# Altium PCB pcb.PcbDoc (part 1 of 2)
Units mm, origin at the board's own origin, x right, y up, seen from the top; angles counter-clockwise.
Board outline 150 x 136 mm, 2 copper layers (Top Layer, Bottom Layer); 100 components, 101 nets, 620 pads, 663 vias.
Unrouted connection lines stored in the file: 2.
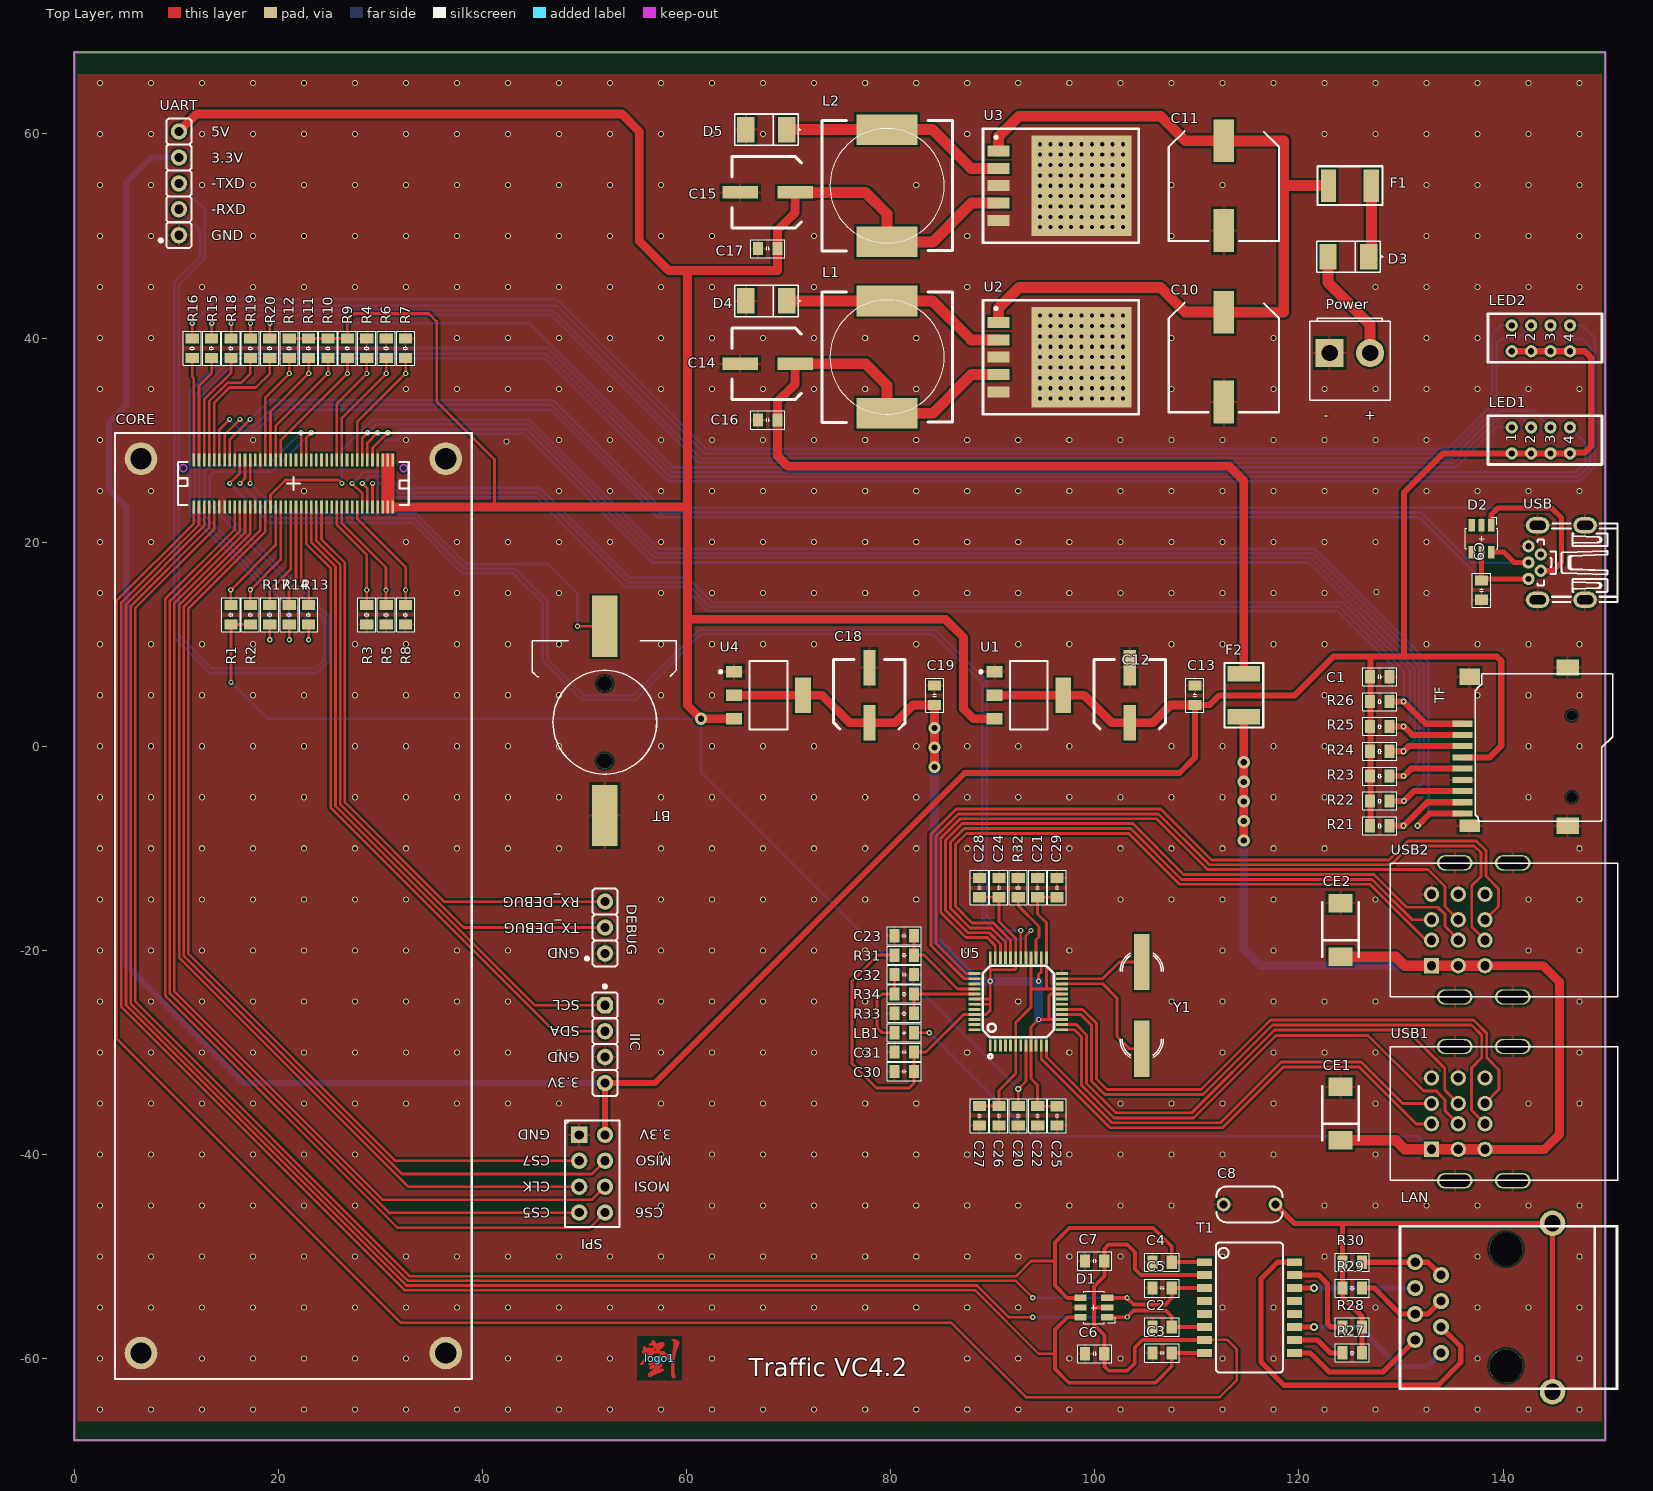
[diagram p0: Top Layer view]
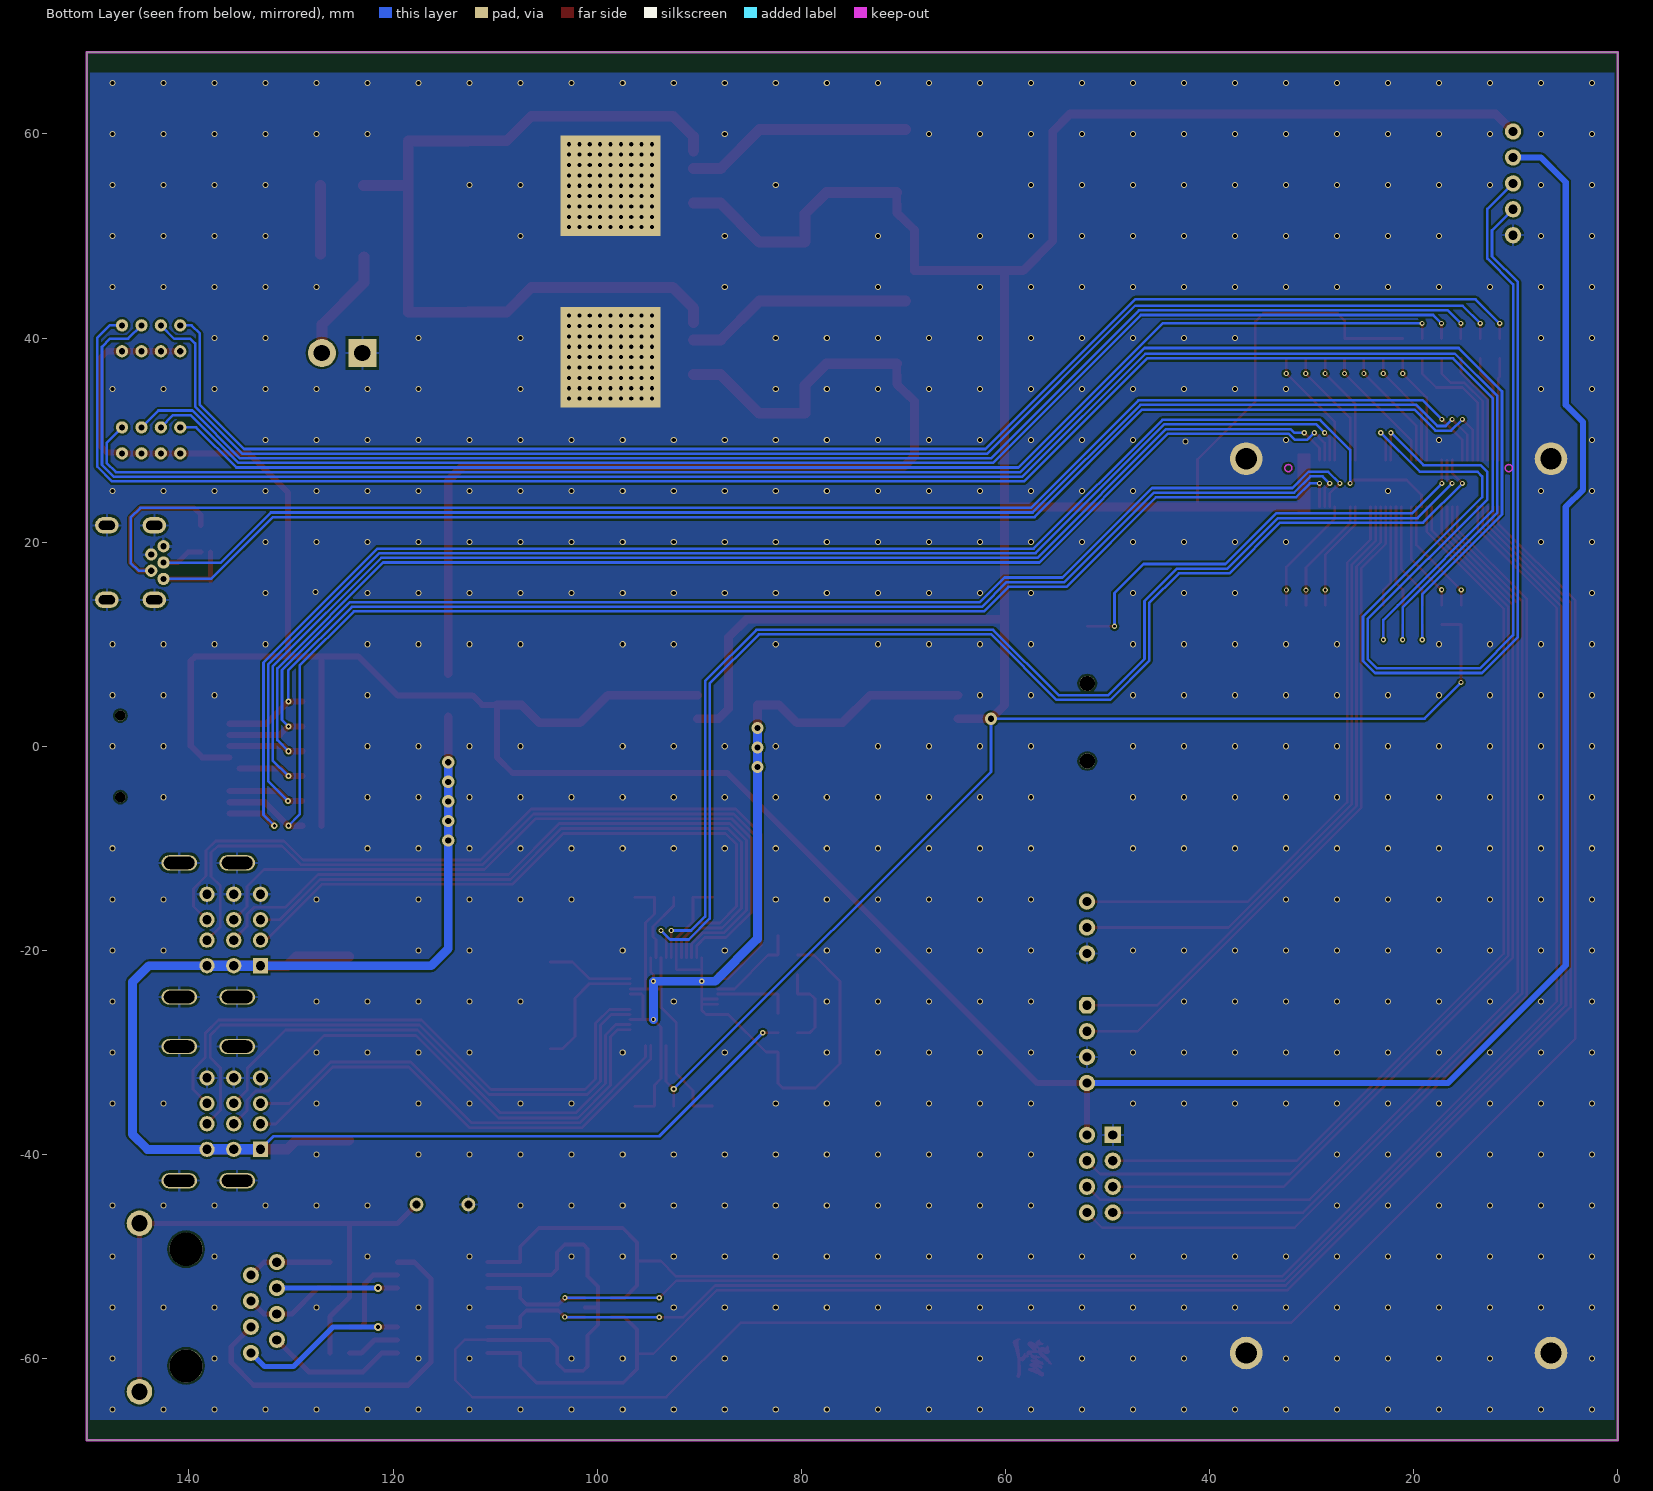
[diagram p1: Bottom Layer view, seen from below]

## Layer stack, top to bottom
Top Solder: solder mask 0.0102, Solder Resist, Dk 3.5
Top Layer: signal copper 0.0356
Dielectric1: dielectric 0.32, FR-4, Dk 4.8
Bottom Layer: signal copper 0.0356
Bottom Solder: solder mask 0.0102, Solder Resist, Dk 3.5

## Board outline
0,-68 150,-68 150,68 0,68

## Design rules (kind name [scope] priority, off if disabled: settings)
Clearance [All] p1: gap=0.2 ignorepadtopadclearanceinfootprint=FALSE except(0: Arc-Hole Track-Hole SMDPad-Hole THPad-Hole Via-Hole Fill-Hole Poly-Hole Region-Hole Text-Hole)
Height [All] p1: minheight=0 maxheight=50.8 prefheight=25.4
HoleToHoleClearance [All] p1: gap=0.125 allowstackedmicrovias=TRUE
MinimumSolderMaskSliver [All] p1: minsoldermaskwidth=0.125
PlaneConnect [All] p1: planeconnectstyle=Direct reliefexpansion=0.508 reliefentries=4 reliefconductorwidth=0.254 reliefairgap=0.254
PolygonConnect PolygonConnect_4 [All vs HasFootprint('LINUX_CORE')] p1: connectstyle=Direct reliefconductorwidth=0.254 reliefentries=4 polygonreliefangle="90 Angle" airgapwidth=0.254
PolygonConnect PolygonConnect_3 [All vs HasFootprint('CON_90')] p2: connectstyle=Direct reliefconductorwidth=0.254 reliefentries=4 polygonreliefangle="90 Angle" airgapwidth=0.254
PolygonConnect PolygonConnect_2 [All vs HasFootprint('TO-263-B')] p3: connectstyle=Direct reliefconductorwidth=0.254 reliefentries=4 polygonreliefangle="90 Angle" airgapwidth=0.254
PolygonConnect PolygonConnect_1 [All vs IsVia] p4: connectstyle=Direct reliefconductorwidth=0.254 reliefentries=4 polygonreliefangle="90 Angle" airgapwidth=0.254
PolygonConnect [All] p5: connectstyle=Relief reliefconductorwidth=0.254 reliefentries=4 polygonreliefangle="90 Angle" airgapwidth=0.254
RoutingVias [All] p1: holewidth=0.711 width=1.27 viastyle="Through Hole" minholewidth=0.711 minwidth=1.27 maxholewidth=0.711 maxwidth=1.27
SilkToSolderMaskClearance SilkscreenOverComponentPads [IsPad] p1: minsilkscreentomaskgap=0.254 clearancetoexposedcopper=TRUE
SolderMaskExpansion [All] p1: expansion=0.102
Width [All] p1: maxlimit=2.54 minlimit=0.254 preferedwidth=0.254
25 further rules are at their usual default settings.

## Classes and differential pairs
component class Ethernet: C20 C21 C22 C23 C24 C25 C26 C27 C28 C29 C30 C31 C32 CE1 CE2 CE? DOWN1 DOWN2 DOWN3 DOWN4 EC1 EC2 EC3 EC4 EC5 EC6 F2 J1 LB1 LB5 LB6 LB? Q1 R31 R32 R33 R34 U5 UP1 USB1 USB2 Y1 Y?
component class core: CORE LED1 LED2 logo1 R1 R2 R3 R4 R5 R6 R7 R8 R9 R10 R11 R12 R13 R14 R15 R16 R17 R18 R19 R20
component class Interface: C1 C2 C3 C4 C5 C6 C7 C8 C9 D1 D2 DEBUG IIC LAN Power R21 R22 R23 R24 R25 R26 R27 R28 R29 R30 SPI T1 TF UART USB
component class Power: BT C10 C11 C12 C13 C14 C15 C16 C17 C18 C19 C38 C39 C40 D3 D4 D5 D20 D31 E61 F1 L1 L2 LED62 R246 R247 R248 R249 R250 U1 U2 U3 U4

## Components (designator, comment, footprint, x,y, rotation, side; value= is the part's Value field where it differs from the comment)
BT "BATTERY" CR-1220 51.98,2.48 r90 top
C1 "0.1uF" "0805/2012 C3" 127.931,6.81 r0 top
C2 "15PF" "0805/2012 C3" 106.59,-56.905 r180 top
C3 "15PF" "0805/2012 C3" 106.59,-59.45 r180 top
C4 "15PF" "0805/2012 C3" 106.59,-50.555 r0 top
C5 "15PF" "0805/2012 C3" 106.59,-53.095 r180 top
C6 "1uF" "0805/2012 C3" 99.984,-59.53 r0 top
C7 "0.1uF" "0805/2012 C3" 99.984,-50.44 r0 top
C8 "0.1nF 2Kv" CAPRR508-350X650X700 115.16,-44.9 r180 top
C9 "0.1uF" "0805/2012 C3" 137.9,15.3 r90 top
C10 "470UF/35V" SMT_10X10_3-AECAP 112.647,38.13 r90 top
C11 "470UF/35V" SMT_10X10_3-AECAP 112.647,54.93 r90 top
C12 "470UF/6.3V" SMT_6_3X7_7-AECAP 103.42,5 r270 top
C13 "0.1uF" "0805/2012 C3" 109.81,5 r90 top
C14 "470UF/6.3V" SMT_6_3X7_7-AECAP 67.947,37.48 r0 top
C15 "470UF/6.3V" SMT_6_3X7_7-AECAP 67.947,54.28 r0 top
C16 "0.1uF" "0805/2012 C3" 67.947,31.967 r180 top
C17 "0.1uF" "0805/2012 C3" 67.947,48.767 r180 top
C18 "470UF/6.3V" SMT_6_3X7_7-AECAP 77.91,5 r270 top
C19 "0.1uF" "0805/2012 C3" 84.3,5 r90 top
C20 "0.1uF" "0805/2012 C3" 92.5,-36.21 r90 top
C21 "0.1uF" "0805/2012 C3" 94.4,-13.85 r270 top
C22 "10uF" "0805/2012 C3" 94.4,-36.2 r90 top
C23 "0.1uF" "0805/2012 C3" 81.321,-18.57 r0 top
C24 "0.1uF" "0805/2012 C3" 90.6,-13.85 r270 top
C25 "0.1uF" "0805/2012 C3" 96.3,-36.22 r90 top
C26 "0.1uF" "0805/2012 C3" 90.6,-36.21 r90 top
C27 "10uF" "0805/2012 C3" 88.7,-36.21 r90 top
C28 "0.1uF" "0805/2012 C3" 88.7,-13.85 r270 top
C29 "0.1uF" "0805/2012 C3" 96.3,-13.85 r270 top
C30 "0.1uF" "0805/2012 C3" 81.321,-31.87 r0 top
C31 "0.1uF" "0805/2012 C3" 81.32,-29.97 r0 top
C32 "0.1uF" "0805/2012 C3" 81.321,-22.37 r180 top
CE1 "100UF/10V" 2312_6023-20_SMT-TAJ-F 124.08,-36 r270 top
CE2 "100uF/10V" 2312_6023-20_SMT-TAJ-F 124.08,-18 r270 top
CORE "LINUX_CORE" LINUX_CORE 21.47,-15.64 r270 top locked
D1 "DALC208SC6" TSOT-23_6 99.91,-55 r90 top
D2 "SRV05-4" TSOT-23_6 137.9,20.34 r180 top
D3 "1N5824" DO-214AC 124.857,47.97 r0 top
D4 "1N5824" DO-214AC 67.807,43.634 r0 top
D5 "1N5824" DO-214AC 67.807,60.434 r0 top
DEBUG "CON3" COMATEL_385.0358.1.03.400 52.01,-20.303 r90 top
F1 "1A" FUSR_BOURNS_MF-MSMF_STYLE1(H85) 124.997,54.93 r0 top
F2 "3A" FUSR_BOURNS_MF-MSMF_STYLE1(H85) 114.6,5 r90 top
IIC "CON4" COMATEL_385.0358.1.04.400 52.01,-25.383 r270 top
L1 "33uH" MS125 79.647,38.13 r90 top
L2 "33uH" MS125 79.647,54.93 r90 top
LAN "RJ45" RJ45_8P_8C 133.933,-59.445 r0 top locked
LB1 "FB" "0805/2012 F3" 81.32,-28.07 r0 top
LED1 "" 3MM-4SYG/S530-Z 143.71,29.975 r90 top
LED2 "" 3MM-4SYG/S530-Z 143.71,39.975 r90 top
logo1 "CON1" LIU 57.36,-59.97 r0 top
Power "CON2" B2P-VH 124.997,38.53 r180 top
R1 "10K" "0805/2012 R3" 15.352,12.88 r270 top
R2 "10K" "0805/2012 R3" 17.254,12.88 r270 top
R3 "10K" "0805/2012 R3" 28.659,12.88 r270 top
R4 "10K" "0805/2012 R3" 28.659,39.01 r90 top
R5 "10K" "0805/2012 R3" 30.56,12.88 r270 top
R6 "10K" "0805/2012 R3" 30.56,39.01 r90 top
R7 "10K" "0805/2012 R3" 32.46,39.01 r90 top
R8 "10K" "0805/2012 R3" 32.46,12.88 r270 top
R9 "10K" "0805/2012 R3" 26.759,39.01 r90 top
R10 "10K" "0805/2012 R3" 24.858,39.01 r90 top
R11 "10K" "0805/2012 R3" 22.958,39.01 r90 top
R12 "10K" "0805/2012 R3" 21.057,39.01 r90 top
R13 "330Ω" "0805/2012 R3" 22.958,12.88 r90 top
R14 "330Ω" "0805/2012 R3" 21.057,12.88 r90 top
R15 "330Ω" "0805/2012 R3" 13.451,39.01 r270 top
R16 "330Ω" "0805/2012 R3" 11.549,39.01 r270 top
R17 "330Ω" "0805/2012 R3" 19.156,12.88 r90 top
R18 "330Ω" "0805/2012 R3" 15.352,39.01 r270 top
R19 "330Ω" "0805/2012 R3" 17.254,39.01 r270 top
R20 "330Ω" "0805/2012 R3" 19.156,39.01 r270 top
R21 "47K" "0805/2012 R3" 127.931,-7.79 r180 top
R22 "47K" "0805/2012 R3" 127.931,-5.357 r180 top
R23 "47K" "0805/2012 R3" 127.931,-2.923 r180 top
R24 "47K" "0805/2012 R3" 127.931,-0.49 r180 top
R25 "47K" "0805/2012 R3" 127.931,1.943 r180 top
R26 "47K" "0805/2012 R3" 127.931,4.377 r180 top
R27 "75Ω" "0805/2012 R3" 125.23,-59.445 r0 top
R28 "75Ω" "0805/2012 R3" 125.23,-56.905 r0 top
R29 "75Ω" "0805/2012 R3" 125.23,-53.095 r0 top
R30 "75Ω" "0805/2012 R3" 125.23,-50.555 r0 top
R31 "100K" "0805/2012 R3" 81.321,-20.47 r0 top
R32 "2.7K" "0805/2012 R3" 92.5,-13.85 r270 top
R33 "100K" "0805/2012 R3" 81.321,-26.17 r0 top
R34 "47K" "0805/2012 R3" 81.321,-24.27 r0 top
SPI "MHDR2X4" M20N-2X04-2.54 50.74,-41.89 r270 top
T1 "TS8121C" XFMR_PULSE_H1260NL 115.16,-55 r0 top
TF "TF" TFP09-2-12B-G 136.03,0.01 r180 top
U1 "LM1117" SOT-223 93.53,5 r270 top
U2 "LM2596" TO-263-B 90.57,38.13 r270 top
U3 "LM2596" TO-263-B 90.57,54.93 r270 top
U4 "LM1117" SOT-223 68.02,5 r270 top
U5 "FE2.1" LQFP-48L 92.5,-25.03 r180 top
UART "CON5" COMATEL_386.0358.1.05.440 10.25,50.08 r90 top
USB "USB(MINI)" WURTH_651005136521 142.5,18 r90 top
USB1 "USB_4" USB-3 140.957,-42.57 r90 top
USB2 "USB_4" USB-3 140.957,-24.57 r90 top
Y1 "12M" XTAL_CITIZEN_HCM49 104.6,-25.39 r270 top

## Footprints (in the part's own frame and the unit in brackets; to place one, negate y for a bottom-side part, rotate by r counter-clockwise, add the part's x,y. Pads: shape width x height; smd on the part's side, far side on the other; paste and mask are expansions set on the pad)
3MM-4SYG/S530-Z [mm]
  round 1.2 hole 0.6: 1(-1.27,2.85) 2(1.27,2.85) 3(-1.27,0.95) 4(1.27,0.95) 5(-1.27,-0.95) 6(1.27,-0.95) 7(-1.27,-2.85) 8(1.27,-2.85)
  silkscreen extent -2.36,-5.99 2.41,5.18, body extent -2.17,-9.13 2.23,5.07, height 20.3
"0805/2012 C3" [mm]
  rect 1x1.3 smd: 1(-0.95,0) 2(0.95,0)
  silkscreen extent -1.68,-0.89 1.68,0.89, body extent -1.45,-0.65 1.45,0.65, height 1.25
"0805/2012 F3" [mm]
  rect 1x1.3 smd: 1(-0.95,0) 2(0.95,0)
  silkscreen extent -1.68,-0.89 1.68,0.89, body extent -1.45,-0.65 1.45,0.65, height 1.25
"0805/2012 R3" [mm]
  rect 1x1.3 smd: 1(-0.95,0) 2(0.95,0)
  silkscreen extent -1.68,-0.89 1.68,0.89, body extent -1.45,-0.65 1.45,0.65, height 0.51
2312_6023-20_SMT-TAJ-F [mm]
  rect 1.8x2.388 smd mask+0.051: 1(2.621,0) 2(-2.621,0)
  silkscreen extent -2.7,-1.8 2.6,1.8, body extent -3.5,-1.61 3.5,1.59, height 2
B2P-VH [mm] "VH Connector"
  rect 2.75x2.75 hole 1.6: 1(1.98,0)
  round 2.75 hole 1.6: 2(-1.98,0)
  silkscreen extent -3.95,-3.4 3.95,4.6, body extent -3.9,-4.15 3.96,4.95, height 10.9
CAPRR508-350X650X700 [mm] "Capacitor Radial Rounded, Pin spacing 5.08mm - Body With 3.5mm X Body Length 6.5mm X Body Height 7mm"
  round 1.35 hole 0.8: 1(-2.54,0) 2(2.54,0)
  silkscreen extent -3.25,-1.75 3.25,1.75, body extent -3.29,-1.75 3.29,1.75, height 7
COMATEL_385.0358.1.03.400 [mm] "3 Contacts Straight Strip Header Pitch 2.54mm L=6.3mm ''Mini-Wire-Wrap''"
  round 1.6 hole 0.9: 1(0,0) 2(2.54,0) 3(5.08,0)
  silkscreen extent -1.27,-1.23 6.35,1.93, body extent -1.27,-1.22 6.35,1.23, height 8
COMATEL_385.0358.1.04.400 [mm] "4 Contacts Straight Strip Header Pitch 2.54mm L=6.3mm ''Mini-Wire-Wrap''"
  oct 1.6x1.6 hole 0.9: 1(0,0)
  round 1.6 hole 0.9: 2(2.54,0) 3(5.08,0) 4(7.62,0)
  silkscreen extent -2,-1.23 8.89,1.23, body extent -1.27,-1.22 8.89,1.23, height 8
COMATEL_386.0358.1.05.440 [mm] "5 Contacts Straight Strip Header Pitch 2.54mm L=6.3mm ''Mini-Wire-Wrap''"
  round 1.6 hole 0.9: 1(0,0) 2(2.54,0) 3(5.08,0) 4(7.62,0) 5(10.16,0)
  silkscreen extent -1.27,-1.23 11.43,1.93, body extent -1.27,-1.22 11.43,1.23, height 8
CR-1220 [mm]
  oval 1.504x1.509 hole 1.499: 0(-3.927,0) 0(3.673,0)
  rect 6x2.5 smd: 1(9.271,0) 2(-9.271,0)
  silkscreen extent -5.2,-6.98 7.87,7.11, body extent -12.3,-7.4 12.3,7.6, height 4.3
DO-214AC [mm]
  rect 1.7x2.5 smd: 1(-2,0) 2(2,0)
  silkscreen extent -3.1,-1.52 3.38,1.52, body extent -2.85,-1.25 2.85,1.25, height 1.9
FUSR_BOURNS_MF-MSMF_STYLE1(H85) [mm] "PTC Resettable Fuse, MF-MSMS Series, Case Style 1 Height 0.85mm"
  rect 1.5x3.2 smd: 1(-2.1,0) 2(2.1,0)
  silkscreen extent -3.17,-1.91 3.17,1.91, body extent -2.85,-1.71 2.85,1.71, height 0.85
LINUX_CORE [mm]
  rect 1.254x0.254 smd: 1(-43.695,9.75) 2(-43.695,9.25) 3(-43.695,8.75) 4(-43.695,8.25) 5(-43.695,7.75) 6(-43.695,7.25) 7(-43.695,6.75) 8(-43.695,6.25) 9(-43.695,5.75) 10(-43.695,5.25) 11(-43.695,4.75) 12(-43.695,4.25) 13(-43.695,3.75) 14(-43.695,3.25) 15(-43.695,2.75) 16(-43.695,2.25) 17(-43.695,1.75) 18(-43.695,1.25) 19(-43.695,0.75) 20(-43.695,0.25) 21(-43.695,-0.25) 22(-43.695,-0.75) 23(-43.695,-1.25) 24(-43.695,-1.75) 25(-43.695,-2.25) 26(-43.695,-2.75) 27(-43.695,-3.25) 28(-43.695,-3.75) 29(-43.695,-4.25) 30(-43.695,-4.75) 31(-43.695,-5.25) 32(-43.695,-5.75) 33(-43.695,-6.25) 34(-43.695,-6.75) 35(-43.695,-7.25) 36(-43.695,-7.75) 37(-43.695,-8.25) 38(-43.695,-8.75) 39(-43.695,-9.25) 40(-43.695,-9.75) 41(-39.095,-9.75) 42(-39.095,-9.25) 43(-39.095,-8.75) 44(-39.095,-8.25) 45(-39.095,-7.75) 46(-39.095,-7.25) 47(-39.095,-6.75) 48(-39.095,-6.25) 49(-39.095,-5.75) 50(-39.095,-5.25) 51(-39.095,-4.75) 52(-39.095,-4.25) 53(-39.095,-3.75) 54(-39.095,-3.25) 55(-39.095,-2.75) 56(-39.095,-2.25) 57(-39.095,-1.75) 58(-39.095,-1.25) 59(-39.095,-0.75) 60(-39.095,-0.25) 61(-39.095,0.25) 62(-39.095,0.75) 63(-39.095,1.25) 64(-39.095,1.75) 65(-39.095,2.25) 66(-39.095,2.75) 67(-39.095,3.25) 68(-39.095,3.75) 69(-39.095,4.25) 70(-39.095,4.75) 71(-39.095,5.25) 72(-39.095,5.75) 73(-39.095,6.25) 74(-39.095,6.75) 75(-39.095,7.25) 76(-39.095,7.75) 77(-39.095,8.25) 78(-39.095,8.75) 79(-39.095,9.25) 80(-39.095,9.75)
  round 3.2 hole 2.1: 4(-43.815,-14.935) 4(-43.815,14.935) 4(43.815,-14.935) 4(43.815,14.935)
  Keep-Out Layer circle w0.152: c-42.9,-10.8 r0.35
  Keep-Out Layer circle w0.152: c-42.9,10.8 r0.35
  silkscreen extent -46.36,-17.48 46.36,17.48
LIU [mm] "LOGO"
  Top Layer drawing of 916 lines, arcs and shapes, not listed
LQFP-48L [mil] "LQFP-48L_DM9161A_"
  rrect0% 11x47 smd mask+2.76: 1(108.27,169.29) 2(88.58,169.29) 3(68.9,169.29) 4(49.21,169.29) 5(29.53,169.29) 6(9.84,169.29) 7(-9.84,169.29) 8(-29.53,169.29) 9(-49.21,169.29) 10(-68.9,169.29) 11(-88.58,169.29) 12(-108.27,169.29) 25(-108.27,-169.29) 26(-88.58,-169.29) 27(-68.9,-169.29) 28(-49.21,-169.29) 29(-29.53,-169.29) 30(-9.84,-169.29) 31(9.84,-169.29) 32(29.53,-169.29) 33(49.21,-169.29) 34(68.9,-169.29) 35(88.58,-169.29) 36(108.27,-169.29)
  rrect0% 47x11 smd mask+2.76: 13(-169.29,108.27) 14(-169.29,88.58) 15(-169.29,68.9) 16(-169.29,49.21) 17(-169.29,29.53) 18(-169.29,9.84) 19(-169.29,-9.84) 20(-169.29,-29.53) 21(-169.29,-49.21) 22(-169.29,-68.9) 23(-169.29,-88.58) 24(-169.29,-108.27) 37(169.29,-108.27) 38(169.29,-88.58) 39(169.29,-68.9) 40(169.29,-49.21) 41(169.29,-29.53) 42(169.29,-9.84) 43(169.29,9.84) 44(169.29,29.53) 45(169.29,49.21) 46(169.29,68.9) 47(169.29,88.58) 48(169.29,108.27)
  silkscreen extent -138,-138 138,219, body extent -193,-193 193,193, height 63
M20N-2X04-2.54 [mm] "2.54mm"
  rect 1.6x1.6 hole 0.9: 1(-3.81,-1.27)
  round 1.6 hole 0.9: 2(-3.81,1.27) 3(-1.27,-1.27) 4(-1.27,1.27) 5(1.27,-1.27) 6(1.27,1.27) 7(3.81,-1.27) 8(3.81,1.27)
  silkscreen extent -5.21,-2.67 5.21,2.67, body extent -5.08,-2.54 5.08,2.54, height 9.54
MS125 [mm]
  rect 3x6 smd: 1(-5.5,0) 2(5.5,0)
  silkscreen extent -6.4,-6.4 6.4,6.4, body extent -7,-6.1 7,5.9, height 5.95
RJ45_8P_8C [mm]
  round 3.25 hole 3.25 unplated: 0(6.35,-1.27) 0(6.35,10.16)
  round 2.5 hole 1.6: 0(10.92,-3.8) 0(10.92,12.69)
  round 1.575 hole 0.9: 1(0,0) 2(-2.54,1.27) 3(0,2.54) 4(-2.54,3.81) 5(0,5.08) 6(-2.54,6.35) 7(0,7.62) 8(-2.54,8.89)
  silkscreen extent -4.03,-3.5 17.24,12.39
SMT_6_3X7_7-AECAP [mm]
  rect 3.5x1.2 smd: 1(2.7,0) 2(-2.7,0)
  silkscreen extent -3.5,-3.5 3.3,3.5, body extent -4.45,-3.3 4.45,3.3, height 7.7
SMT_10X10_3-AECAP [mm]
  rect 4.2x2 smd: 1(4.4,0) 2(-4.4,0)
  silkscreen extent -5.4,-5.4 5.35,5.4, body extent -6.5,-5.2 6.5,5.2, height 10.3
SOT-223 [mm]
  rect 1.1x1.55 smd mask+0.07: 1(-2.3,-3.375) 2(0,-3.375) 3(2.3,-3.375)
  rect 3.45x1.55 smd: 4(0,3.375)
  silkscreen extent -3.35,-4.82 3.35,1.85, body extent -3.26,-4.15 3.24,4.15, height 1.8
TFP09-2-12B-G [mm]
  round 1 hole 1 unplated: 0(-10.7,-3) 0(-10.7,5.001)
  rect 2x0.6 smd: 1(0,-2.2) 2(0,-1.1) 3(0,0) 4(0,1.1) 5(0,2.2) 6(0,3.3) 7(0,4.4) 8(0,5.5) 9(0,6.6)
  rect 2x1.2 smd: 10(-0.7,7.8)
  rect 2.2x1.6 smd: 11(-10.3,7.8) 12(-10.3,-7.7)
  rect 2x1.6 smd: 13(-0.7,-6.8)
  silkscreen extent -14.72,-7.1 -1.24,7.34, body extent -16.75,-8 0.45,8.1, height 3.2
TO-263-B [mm]
  rect 1.7x1.7 hole 0.4: 0(-4.064,10.16) 0(-4.064,11.176) 0(-4.064,12.192) 0(-4.064,6.096) 0(-4.064,7.112) 0(-4.064,8.128) 0(-4.064,9.144) 0(-4.064,4.064) 0(-4.064,5.08) 0(-3.048,11.176) 0(-3.048,12.192) 0(-3.048,9.144) 0(-3.048,10.16) 0(-3.048,7.112) 0(-3.048,8.128) 0(-3.048,5.08) 0(-3.048,6.096) 0(-3.048,4.064) 0(-2.032,11.176) 0(-2.032,12.192) 0(-2.032,9.144) 0(-2.032,10.16) 0(-2.032,7.112) 0(-2.032,8.128) 0(-2.032,5.08) 0(-2.032,6.096) 0(-2.032,4.064) 0(-1.016,12.192) 0(-1.016,11.176) 0(-1.016,10.16) 0(-1.016,9.144) 0(-1.016,8.128) 0(-1.016,7.112) 0(-1.016,6.096) 0(-1.016,5.08) 0(-1.016,4.064) 0(0,12.192) 0(0,11.176) 0(0,10.16) 0(0,9.144) 0(0,8.128) 0(0,7.112) 0(0,6.096) 0(0,5.08) 0(0,4.064) 0(1.016,12.192) 0(1.016,11.176) 0(1.016,10.16) 0(1.016,9.144) 0(1.016,8.128) 0(1.016,7.112) 0(1.016,6.096) 0(1.016,5.08) 0(1.016,4.064) 0(2.032,11.176) 0(2.032,12.192) 0(2.032,9.144) 0(2.032,10.16) 0(2.032,7.112) 0(2.032,8.128) 0(2.032,5.08) 0(2.032,6.096) 0(2.032,4.064) 0(3.048,11.176) 0(3.048,12.192) 0(3.048,9.144) 0(3.048,10.16) 0(3.048,7.112) 0(3.048,8.128) 0(3.048,5.08) 0(3.048,6.096) 0(3.048,4.064) 0(4.064,10.16) 0(4.064,11.176) 0(4.064,12.192) 0(4.064,6.096) 0(4.064,7.112) 0(4.064,8.128) 0(4.064,9.144) 0(4.064,4.064) 0(4.064,5.08)
  round 0.4 hole 0.4: 0(-4.064,4.064) 0(-3.048,4.064) 0(-2.032,4.064) 0(-1.016,4.064) 0(0,4.064) 0(1.016,4.064) 0(2.032,4.064) 0(3.048,4.064)
  rect 1.07x2.16 smd: 1(-3.4,0) 2(-1.7,0) 3(0,0) 4(1.7,0) 5(3.4,0)
  silkscreen extent -5.59,-1.52 5.59,13.72, body extent -5.21,-0.13 5.21,12.29, height 4.65
TSOT-23_6 [mm]
  rect 0.62x1.22 smd mask+0.07: 1(-0.95,-1.31) 2(0.001,-1.31) 3(0.95,-1.31) 4(0.95,1.31) 5(0.001,1.31) 6(-0.95,1.31)
  silkscreen extent -1.6,-2.1 1.6,1, body extent -1.45,-1.4 1.45,1.4, height 1.1
USB-3 [mm]
  rect 1.5x1.5 hole 0.92: 1(3.07,7.96)
  round 1.5 hole 0.92: 2(5.57,7.96) 3(7.57,7.96) 4(10.07,7.96) 5(3.07,5.34) 6(5.57,5.34) 7(7.57,5.34) 8(10.07,5.34) 9(3.07,2.72) 10(5.57,2.72) 11(7.57,2.72) 12(10.07,2.72)
  oval 1.5x3.5 hole 1.2 slot 3 at 90 deg: 13(0,5.68) 14(13.14,5.68) 15(0,0) 16(13.14,0)
  silkscreen extent 0.02,-10.28 13.1,12
WURTH_651005136521 [mm] "Mini USB Type B Horizontal 5 Contacts"
  round 1.2 hole 0.6: 1(-1.6,0) 2(-0.8,-1.2) 3(0,0) 4(0.8,-1.2) 5(1.6,0)
  oval 1.6x2.3 hole 0.9 slot 1.6 at 90 deg: 6(-3.65,-5.55) 6(-3.65,-0.9) 6(3.65,-5.55) 6(3.65,-0.9)
  silkscreen extent -3.85,-8.7 3.85,-0.9, body extent -4.07,-8.7 4.08,0.13, height 3.9
XFMR_PULSE_H1260NL [mm] "10/100BASE-T Transformer Modules, Body 7.11 x 12.7mm"
  rect 1.46x0.76 smd: 1(-4.41,4.445) 2(-4.41,3.175) 3(-4.41,1.905) 4(-4.41,0.635) 5(-4.41,-0.635) 6(-4.41,-1.905) 7(-4.41,-3.175) 8(-4.41,-4.445) 9(4.41,-4.445) 10(4.41,-3.175) 11(4.41,-1.905) 12(4.41,-0.635) 13(4.41,0.635) 14(4.41,1.905) 15(4.41,3.175) 16(4.41,4.445)
  silkscreen extent -3.28,-6.35 3.28,6.35, body extent -5.14,-6.35 5.14,6.35, height 6
XTAL_CITIZEN_HCM49 [mm] "CITIZEN HCM49 Case, SMD Cristal, Body 11.4 x 4.7mm"
  rect 5.5x1.5 smd: 1(-4.25,0) 2(4.25,0)
  silkscreen extent -5.11,-2.11 5.11,2.11, body extent -7,-2.35 7,2.35, height 4.3

## Part data
BT: "Battery"
C1 C6 C7 C8 C13 C16 C17 C19: library part Pro39.tmp_22P_32
C2 C3 C4 C5 C9: library part CAP, "Capacitor"
C10 C11 C12 C14 C15 C18: library part 10UF/10V, "CCTC-106K010"
C20 C21 C22 C23 C24 C25 C26 C27 C28 C29 C30 C31 C32: library part Cap, "Capacitor"
  C23 C25 C26 C28 C29 C31 C32: LatestRevisionDate=17-Jul-2002, LatestRevisionNote="Re-released for DXP Platform.", PackageReference=RAD-0.3, Published=8-Jun-2000, Publisher="Altium Limited"
CE1 CE2: library part "Cap Pol1", "Polarized Capacitor (Radial)"
  CE1: LatestRevisionDate=17-Jul-2002, LatestRevisionNote="Re-released for DXP Platform.", PackageReference=RB7.6-15, Published=8-Jun-2000, Publisher="Altium Limited"
D1 D2: library part "HEADER 3X2"
D3 D4 D5: library part 1N5819, "CD-1N5819-DO41"
DEBUG IIC logo1 Power UART: "Connector"
F1 F2: library part "Fuse 2", "Fuse", LatestRevisionDate=17-Jul-2002, LatestRevisionNote="Re-released for DXP Platform.", PackageReference=PIN-W2/E2.8, Published=8-Jun-2000, Publisher="Altium Limited"
L1 L2: library part 100UH-SLF7032, "CL-SLF7032-101"
LB1: library part FB-0805
LED1 LED2: library part 3MM-4SYG/S530-Z
R1 R2 R3 R4 R5 R6 R7 R8 R9 R10 R11 R12 R13 R14 R15 R16 R17 R18 R19 R20 R21 R22 R23 R24 R25 R26 R27 R28 R29 R30: library part RES2, "Resistor"
R31 R32 R33 R34: library part Res2, "Resistor"
  R31 R33 R34: LatestRevisionDate=17-Jul-2002, LatestRevisionNote="Re-released for DXP Platform.", PackageReference=AXIAL-0.4, Published=8-Jun-2000, Publisher="Altium Limited"
SPI: "Header, 4-Pin, Dual row"
U2 U3: "CI-LM2575T-5.0"
U5: library part F2.1
USB: "USB-MINI"
USB1 USB2: "USB 1.1, Right Angle, Thru-Hole, A Type, Receptacle, 4x4x4x4 Position, Fourfold Stacked, Black", PackageDocument=30-Jul-2002, ComponentLink1Description="Manufacturer Link", ComponentLink1URL=http://www.tycoelectronics.com/, ComponentLink2Description="Packaging Specification", ComponentLink2URL=http://ecommas.tycoelectronics.com/commerce/DocumentDelivery/DDEController?Action=showdoc&DocId=Customer+Drawing%7F1470007%7FO%7Fpdf%7FEnglish%7FENG_CD_1470007_O.pdf, ContactMaterial="Phosphor Bronze", ContactPlating="Gold (30) over Nickel (50)", DatasheetDocument=30-Jul-2002, DrillSize="Corresponds to nominal value.", HousingMaterial="30% Glass-Filled Thermoplastic", PackageReference=1470007, PanelGround=Without, PCB_Layout="Complies with manufacturer's recommendation.", Published=15-Jul-2004, Publisher="Altium Limited", TerminationLength="2.36mm [0.093in.]"
Y1: library part XTAL, "Crystal Oscillator"

## Via types
v1: diameter 0.6, hole 0.4, Top Layer to Bottom Layer, tented both sides, 597 vias
v2: diameter 0.508, hole 0.254, Top Layer to Bottom Layer, tented both sides, 47 vias
v3: diameter 1.2, hole 0.6, Top Layer to Bottom Layer, tented both sides, 9 vias
v4: diameter 0.6, hole 0.3, Top Layer to Bottom Layer, 6 vias
v5: diameter 0.8, hole 0.4, Top Layer to Bottom Layer, 2 vias
v6: diameter 0.6, hole 0.3, Top Layer to Bottom Layer, tented bottom, 1 vias
v7: diameter 0.6, hole 0.3, Top Layer to Bottom Layer, tented both sides, 1 vias

## Nets (pads, with @x,y where several pads share a name; then routed paths per layer and width w, separated by ;. In a path a pad name is that pad's centre, name@x,y a point inside that pad or via, vN(x,y) a via of type N, cw(c..) or ccw(c..) an arc to the next point about the centre after c; other vN are vias at no path point)
-RXD: CORE.18 UART.2 | length 98.5
  Top Layer w0.254: CORE.18@22.72,28.055 22.72,30.23 v2(23.22,30.73)
  Bottom Layer w0.254: UART.2@10.25,52.62 12.312,50.558 12.312,48.012 9.788,45.488 9.788,10.914 9.788,10.701 13.313,7.176 23.766,7.176 24.96,8.37 24.96,12.715 13.273,24.402 13.273,26.457 13.716,26.9 19.39,26.9 v2(23.22,30.73)
-TXD: CORE.19 UART.3 | length 99.3
  Top Layer w0.254: CORE.19@22.22,28.055 v2(22.22,30.73)
  Bottom Layer w0.254: UART.3@10.25,55.16 12.766,52.644 12.766,47.776 10.242,45.252 10.242,10.889 13.501,7.63 23.578,7.63 24.506,8.558 24.506,12.46 12.766,24.2 12.766,26.854 13.459,27.547 19.037,27.547 v2(22.22,30.73)
BATT-IN: BT.1 CORE.29 | length 44.8
  Top Layer w0.254: v2(17.22,25.755) CORE.29@17.22,28.055 ; v2(49.305,11.751) BT.1@51.98,11.751
  Bottom Layer w0.254: v2(17.22,25.755) 20.145,22.83 33.46,22.83 38.432,17.858 46.447,17.858 49.305,15 v2(49.305,11.751)
DM1: U5.18
DM2: U5.16 USB1.10 | length 60.5
  Top Layer w0.279: U5.16@96.8,-26.28 98.615,-26.28 99.671,-27.335 99.671,-32.821 100.979,-34.129 110.616,-34.129 117.426,-27.319 136.922,-27.319 137.925,-28.322 137.925,-30.505 136.93,-31.5 136.93,-35.693 USB1.10@138.237,-37
DM3: U5.13 USB1.6 | length 52.7
  Top Layer w0.279: U5.13@96.8,-27.78 98.006,-27.78 98.713,-28.487 98.713,-33.24 101.892,-36.42 109.68,-36.42 117.77,-28.33 126.78,-28.33 132.23,-33.78 133.46,-33.78 134.33,-34.65 134.33,-35.713 USB1.6@135.617,-37
DM4: U5.11 USB1.2 | length 47.1
  Top Layer w0.279: U5.11@94.75,-29.33 94.75,-30.632 101.496,-37.378 112.512,-37.378 118.47,-31.42 125.913,-31.42 131.493,-37 USB1.2@132.997,-37
DM5: U5.32 USB2.2 | length 66
  Top Layer w0.279: U5.32@91.75,-20.73 91.75,-19.017 90.053,-17.32 87.98,-17.32 86.34,-15.68 86.34,-9.61 87.41,-8.54 103.32,-8.54 108.305,-13.525 126.955,-13.525 132.43,-19 USB2.2@132.997,-19
DM6: U5.34 USB2.6 | length 71.3
  Top Layer w0.279: U5.34@90.75,-20.73 90.75,-19.372 89.656,-18.278 87.583,-18.278 85.382,-16.077 85.382,-9.213 87.013,-7.582 103.717,-7.582 108.702,-12.567 127.352,-12.567 130.555,-15.77 133.604,-15.77 134.3,-16.466 134.3,-17.64 USB2.6@135.617,-18.957
DM7: U5.37 USB2.10 | length 82.4
  Top Layer w0.279: U5.37@88.2,-22.28 87.38,-22.28 84.424,-19.324 84.424,-8.816 86.616,-6.624 106.257,-6.624 111.242,-11.609 129.038,-11.609 130.888,-9.759 137.174,-9.759 137.84,-10.425 137.84,-12.76 136.94,-13.66 136.94,-17.703 USB2.10@138.237,-19
DP1: U5.19
DP2: U5.17 USB1.11 | length 59.4
  Top Layer w0.279: U5.17@96.8,-25.78 98.793,-25.78 100.15,-27.137 100.15,-32.6 101.2,-33.65 110.418,-33.65 117.228,-26.84 137.12,-26.84 138.404,-28.124 138.404,-30.504 139.62,-31.72 139.62,-33.617 USB1.11@138.237,-35
DP3: U5.14 USB1.7 | length 52.8
  Top Layer w0.279: U5.14@96.8,-27.28 98.183,-27.28 99.192,-28.289 99.192,-33.042 102.07,-35.92 109.503,-35.92 117.625,-27.798 130.528,-27.798 134.29,-31.56 134.29,-33.673 USB1.7@135.617,-35
DP4: U5.12 USB1.3 | length 45.7
  Top Layer w0.279: U5.12@95.25,-29.33 95.25,-30.455 101.694,-36.899 112.314,-36.899 118.272,-30.941 126.111,-30.941 130.17,-35 USB1.3@132.997,-35
DP5: U5.33 USB2.3 | length 66.2
  Top Layer w0.279: U5.33@91.25,-20.73 91.25,-19.194 89.854,-17.799 87.782,-17.799 85.861,-15.878 85.861,-9.412 87.212,-8.061 103.518,-8.061 108.503,-13.046 127.153,-13.046 131.107,-17 USB2.3@132.997,-17
DP6: U5.35 USB2.7 | length 71.9
  Top Layer w0.279: U5.35@90.25,-20.73 90.25,-19.549 89.458,-18.757 87.385,-18.757 84.903,-16.275 84.903,-9.015 86.815,-7.103 106.058,-7.103 111.043,-12.088 132.648,-12.088 134.31,-13.75 134.31,-15.693 USB2.7@135.617,-17
DP7: U5.38 USB2.11 | length 83
  Top Layer w0.279: U5.38@88.2,-22.78 87.203,-22.78 83.945,-19.522 83.945,-8.618 86.418,-6.145 106.455,-6.145 111.44,-11.13 128.839,-11.13 130.689,-9.28 137.372,-9.28 138.319,-10.227 138.319,-12.729 139.55,-13.96 139.55,-15.687 USB2.11@138.237,-17
DRV: U5.1
ERX+: C2.1 CORE.43 D1.1 T1.6 | length 173.8
  Top Layer w0.254: CORE.43@12.72,23.455 12.72,21.564 5.062,13.906 5.062,-25.376 32.532,-52.846 88.448,-52.846 91.552,-55.95 v2(93.92,-55.95)
  Top Layer w0.381: D1.1@101.22,-55.95 103.16,-55.95 103.82,-55.29 106.95,-55.29 107.54,-55.88 C2.1@107.54,-56.905 T1.6@110.75,-56.905
  Bottom Layer w0.254: v2(93.92,-55.95) v2@103.16,-55.95
  other v2: 103.18,-55.93
ERX-: C3.1 CORE.42 D1.6 T1.8 | length 181.8
  Top Layer w0.254: CORE.42@12.22,23.455 12.22,21.706 4.608,14.094 4.608,-25.564 32.344,-53.3 88.26,-53.3 94.49,-59.53 96.12,-59.53
  Top Layer w0.381: D1.6@98.6,-55.95 97.32,-55.95 96.11,-57.16 96.11,-61.03 97.45,-62.37 105.93,-62.37 107.54,-60.76 C3.1@107.54,-59.45 T1.8@110.745,-59.45
ETX+: C4.2 CORE.45 D1.4 T1.1 | length 178.3
  Top Layer w0.254: CORE.45@13.72,23.455 13.72,21.28 5.97,13.53 5.97,-25 32.908,-51.938 92.262,-51.938 93.76,-50.44 96.14,-50.44
  Top Layer w0.381: D1.4@98.6,-54.05 97.3,-54.05 96.11,-52.86 96.11,-48.61 97.5,-47.22 105.73,-47.22 107.54,-49.03 C4.2@107.54,-50.555 ; C4.2@107.59,-50.555 T1.1@110.75,-50.555
ETX-: C5.1 CORE.44 D1.3 T1.3 | length 172.5
  Top Layer w0.254: CORE.44@13.22,23.455 13.22,21.422 5.516,13.718 5.516,-25.188 32.72,-52.392 92.262,-52.392 v2(93.92,-54.05)
  Top Layer w0.381: D1.3@101.22,-54.05 v2(103.16,-54.05) 103.819,-54.709 106.911,-54.709 107.54,-54.08 C5.1@107.54,-53.095 T1.3@110.75,-53.095
  Bottom Layer w0.254: v2(93.92,-54.05) v2(103.16,-54.05)
EVDDA: C6.2 C7.2 CORE.41 D1.2 T1.2 T1.7 | length 224.8
  Top Layer w0.254: CORE.41@11.72,23.455 11.72,21.848 4.154,14.282 4.154,-28.654 32,-56.5 85.95,-56.5 93.24,-63.79 112.243,-63.79 113.92,-62.113 113.92,-59.11 112.985,-58.175 T1.7@110.75,-58.175
  Top Layer w0.381: 99.92,-54.999 D1.2@101.22,-54.999 ; C6.2@100.934,-59.53 100.934,-57.714 99.909,-56.689 99.909,-52.921 100.934,-51.896 C7.2@100.934,-50.44 100.934,-49.256 101.35,-48.84 103.18,-48.84 103.92,-49.58 103.92,-51.24 104.505,-51.825 T1.2@110.75,-51.825 ; C6.2@100.934,-59.53 100.934,-60.764 101.37,-61.2 103.18,-61.2 103.91,-60.47 103.91,-58.91 104.645,-58.175 T1.7@110.75,-58.175